# Altium PCB PCB1.PcbDoc
Units mm, origin at the board's own origin, x right, y up, seen from the top; angles counter-clockwise.
Board outline 152.4 x 101.6 mm, 2 copper layers (Top Layer, Bottom Layer); 20 components, 20 nets, 78 pads, 22 vias.
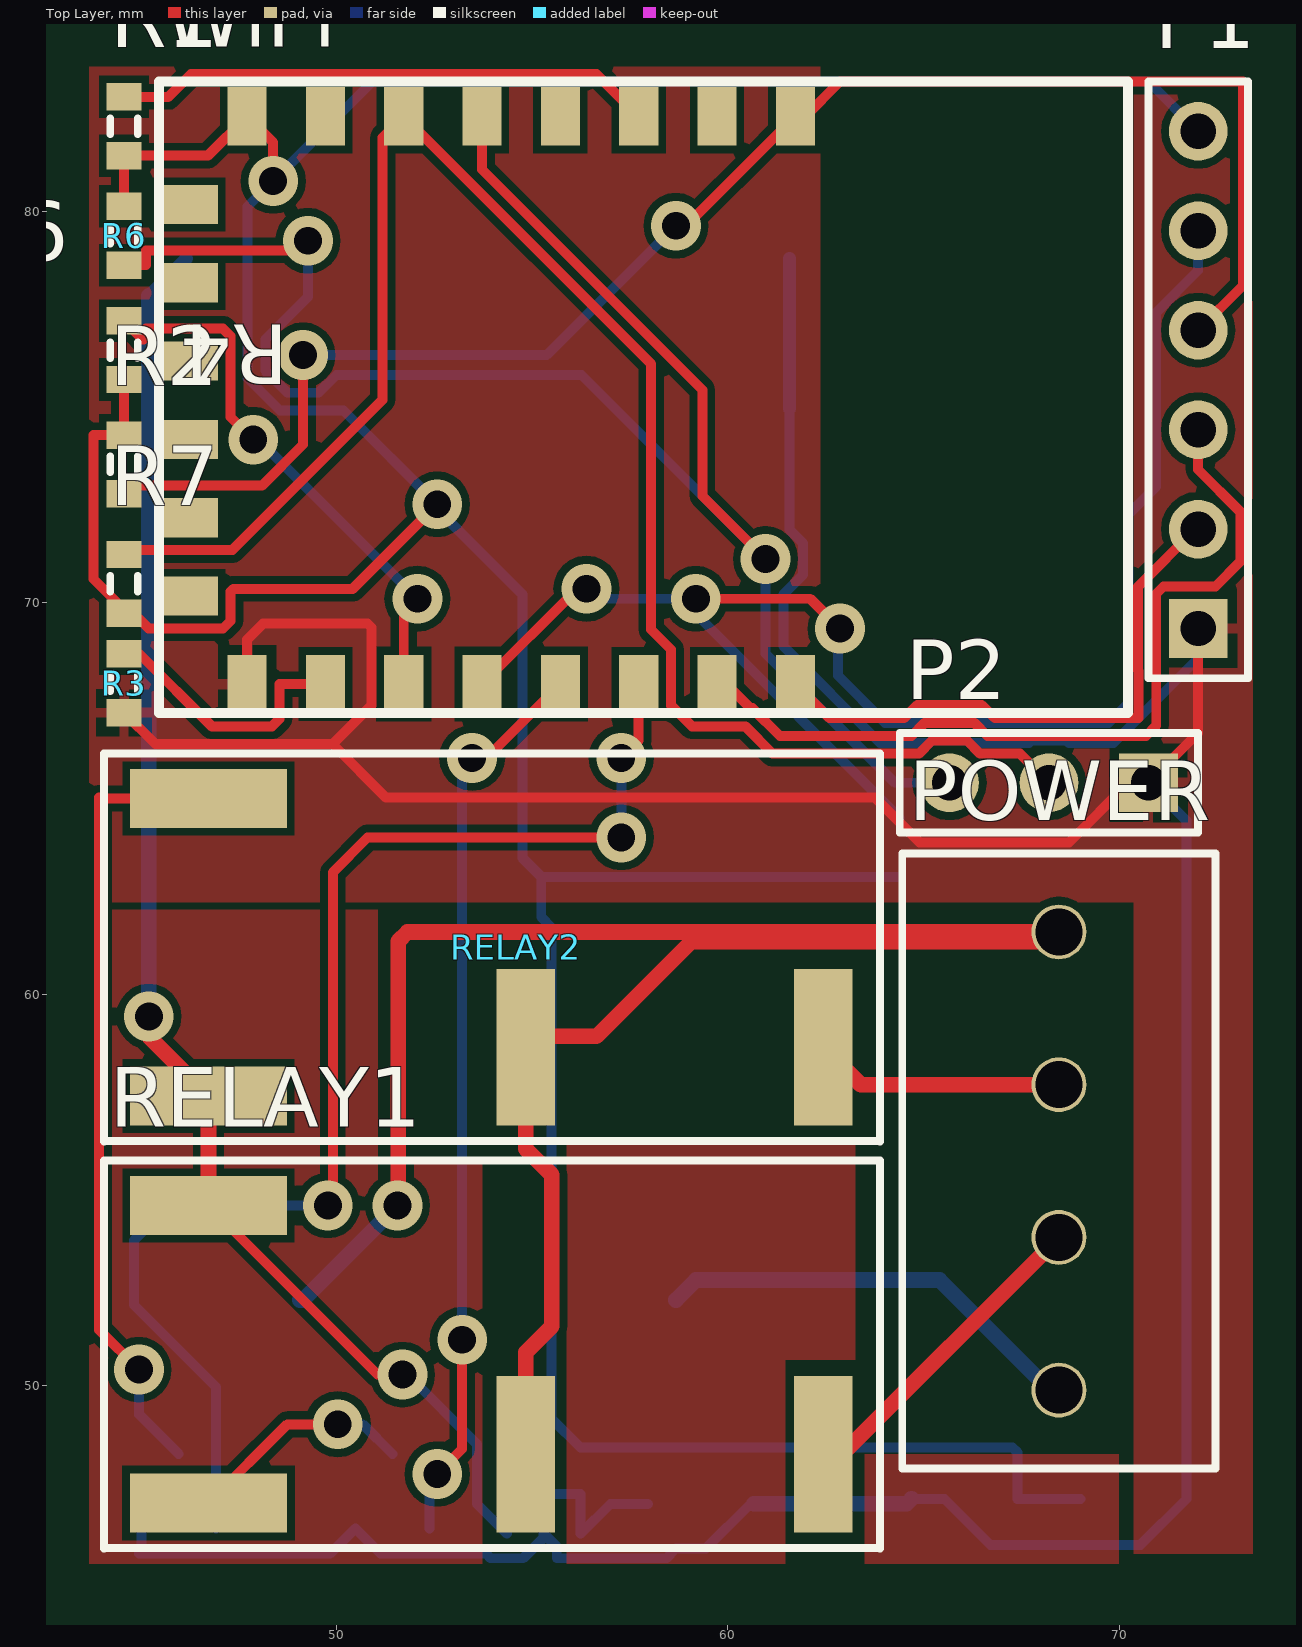
[diagram p0: Top Layer view]
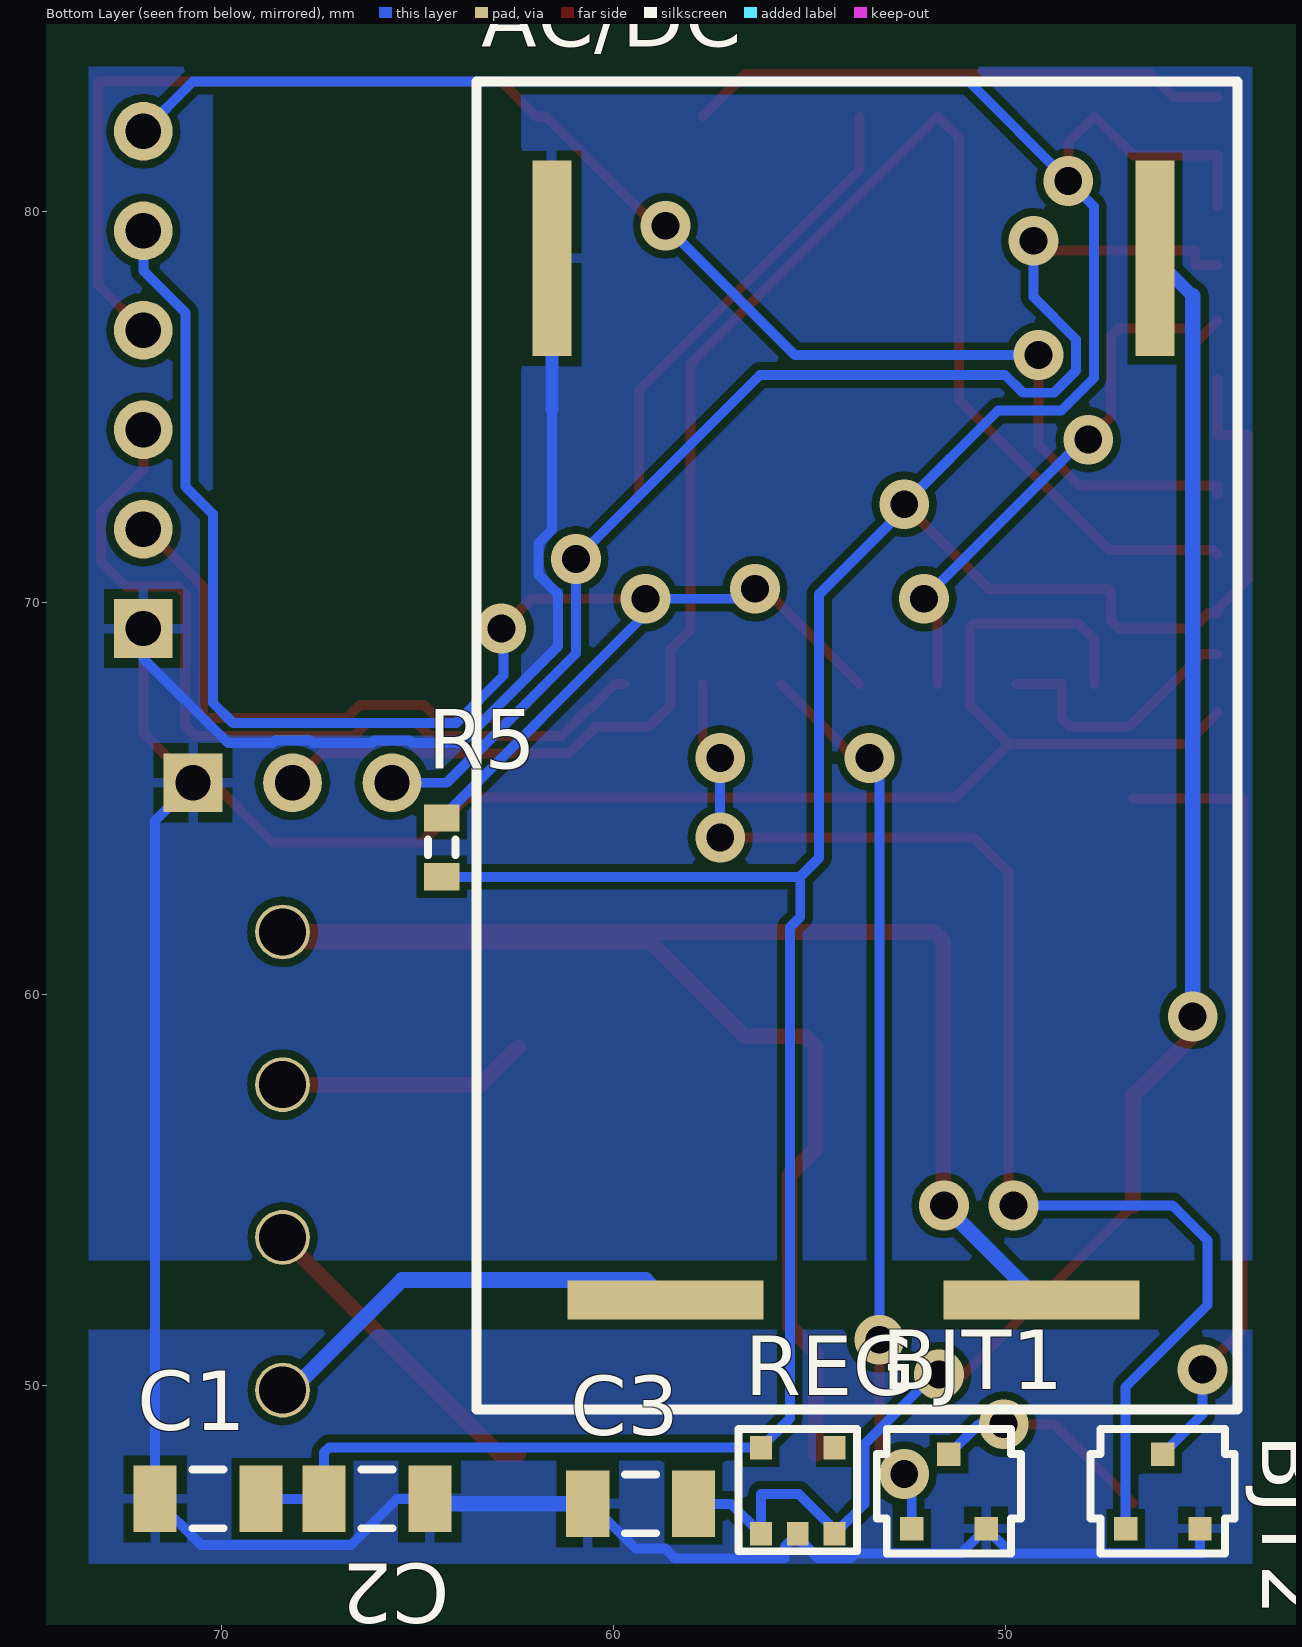
[diagram p1: Bottom Layer view, seen from below]

## Layer stack, top to bottom
Top Solder: solder mask 0.0102, Solder Resist, Dk 3.5
Top Layer: signal copper 0.0356
Dielectric 1: dielectric 0.32, FR-4, Dk 4.8
Bottom Layer: signal copper 0.0356
Bottom Solder: solder mask 0.0102, Solder Resist, Dk 3.5

## Board outline
25.4,25.4 177.8,25.4 177.8,127 25.4,127

## Design rules (kind name [scope] priority, off if disabled: settings)
Clearance [All] p1: gap=0.2 ignorepadtopadclearanceinfootprint=FALSE
PolygonConnect [All] p1: connectstyle=Relief reliefconductorwidth=0.254 reliefentries=4 polygonreliefangle="90 Angle" airgapwidth=0.254
RoutingVias [All] p1: holewidth=0.711 width=1.27 viastyle="Through Hole" minholewidth=0.711 minwidth=1.27 maxholewidth=0.711 maxwidth=1.27
SolderMaskExpansion [All] p1: expansion=0.102
Width [All] p1: maxlimit=0.4 minlimit=0.2 preferedwidth=0.254
30 further rules are at their usual default settings.

## Components (designator, comment, footprint, x,y, rotation, side; value= is the part's Value field where it differs from the comment)
AC/DC "HiLink" HiLink 58.674,52.197 r90 bottom
BJT1 "BJT_BC848B_SOT23" BJT_BC848B_SOT23 50.485,46.36 r0 bottom
BJT2 "BJT_BC848B_SOT23" BJT_BC848B_SOT23 45.024,46.36 r0 bottom
C1 "Cap Semi" C1206 70.358,47.117 r180 bottom value=10uF
C2 "Cap Semi" C1206 66.04,47.117 r0 bottom value=1uF
C3 "Cap Semi" C1206 59.309,46.99 r0 bottom value=22uF
P1 "Header 6" HDR1X6 72.009,69.342 r90 top
P2 "Header 3" HDR1X3 70.739,65.405 r180 top
POWER "Power_Connector" Power_Connector 68.453,49.895 r90 top
R1 "Res3" J1-0603 44.577,82.169 r90 top value=10K
R2 "Res3" J1-0603 44.577,73.533 r270 top value=10K
R3 "Res3" J1-0603 44.577,67.945 r90 top value=10K
R4 "Res3" J1-0603 44.577,76.454 r270 top value=10K
R5 "Res3" J1-0603 64.389,63.754 r270 bottom value=10K
R6 "Res3" J1-0603 44.577,79.375 r270 top value=10K
R7 "Res3" J1-0603 44.577,70.485 r90 top value=10K
REG "RT9013-33GB" RT9013-33GB 56.236,46.228 r180 bottom
RELAY1 "Relay" Relay 46.736,54.61 r180 top
RELAY2 "Relay" Relay 46.736,65.004 r180 top
WiFi "ESP-12F" ESP-12F 61.722,82.423 r270 top

## Footprints (in the part's own frame and the unit in brackets; to place one, negate y for a bottom-side part, rotate by r counter-clockwise, add the part's x,y. Pads: shape width x height; smd on the part's side, far side on the other; paste and mask are expansions set on the pad)
BJT_BC848B_SOT23 [mm]
  rect 0.6x0.6 smd: 1(1.9,0) 2(0,0) 3(0.95,-1.9)
  silkscreen extent -0.89,-2.54 2.79,0.64
C1206 [mm] "Chip Capacitor, Body 3.2x1.6mm, IPC High Density"
  rect 1.1x1.7 smd: 1(-1.35,0) 2(1.35,0)
  silkscreen extent -0.4,-0.75 0.4,0.75, body extent -1.7,-0.9 1.7,0.9, height 1.3
ESP-12F [mm]
  rect 1.5x1 smd: 1(0,0) 2(0,-2) 3(0,-4) 4(0,-6) 5(0,-8) 6(0,-10) 7(0,-12) 8(0,-14) 15(14.5,-14) 16(14.5,-12) 17(14.5,-10) 18(14.5,-8) 19(14.5,-6) 20(14.5,-4) 21(14.5,-2) 22(14.5,0)
  rect 1x1.5 smd: 9(2.25,-15.5) 10(4.25,-15.5) 11(6.25,-15.5) 12(8.25,-15.5) 13(10.25,-15.5) 14(12.25,-15.5)
  silkscreen extent -0.89,-16.26 15.24,8.5
HDR1X3 [mm] "Connector; Header; 3 Position"
  rect 1.5x1.5 hole 0.9: 1(0,0)
  round 1.5 hole 0.9: 2(2.54,0) 3(5.08,0)
  silkscreen extent -1.27,-1.27 6.35,1.27
HDR1X6 [mm] "Connector; Header; 6 Position"
  rect 1.5x1.5 hole 0.9: 1(0,0)
  round 1.5 hole 0.9: 2(2.54,0) 3(5.08,0) 4(7.62,0) 5(10.16,0) 6(12.7,0)
  silkscreen extent -1.27,-1.27 13.97,1.27
HiLink [mm]
  rect 1x5 smd: 1(0,0) 2(0,-9.6)
  rect 5x1 smd: 3(26.6,-12.5) 4(26.6,2.9)
  silkscreen extent -2.79,-14.61 31.11,4.83
J1-0603 [mm] "Chip Resistor, Body 1.6x0.8mm, IPC High Density"
  rect 0.7x0.9 smd: 1(-0.75,0) 2(0.75,0)
  silkscreen extent -0.2,-0.35 0.2,0.35, body extent -0.85,-0.48 0.85,0.48, height 0.9
Power_Connector [mm]
  round 1.4 hole 1.2: 1(0,0) 2(3.9,0) 3(7.8,0) 4(11.7,0)
  silkscreen extent -2,-4 13.7,4
Relay [mm]
  rect 4x1.5 smd: 1(0,0) 2(0,7.6)
  rect 1.5x4 smd: 3(-8.1,6.35) 4(-15.7,6.35)
  silkscreen extent -17.14,-1.15 2.67,8.76
RT9013-33GB [mm]
  rect 0.56x0.6 smd: 1(0,0) 2(0.94,0) 3(1.88,0) 4(1.88,2.2) 5(0,2.2)
  silkscreen extent -0.58,-0.45 2.45,2.67

## Part data
C1 C2 C3: "Capacitor (Semiconductor SIM Model)", LatestRevisionDate=29-May-2009, LatestRevisionNote="IPC-7351 Footprint Added.", PackageDescription="Chip Capacitor", PackageReference=C1206, Published=8-Jun-2000, Publisher="Altium Limited"
P1: "Header, 6-Pin", LatestRevisionDate=17-Jul-2002, LatestRevisionNote="Re-released for DXP Platform.", Publisher="Altium Limited"
P2: "Header, 3-Pin", LatestRevisionDate=17-Jul-2002, LatestRevisionNote="Re-released for DXP Platform.", Publisher="Altium Limited"
R1 R2 R3 R4 R5 R6 R7: "Resistor", LatestRevisionDate=29-May-2009, LatestRevisionNote="IPC-7351 Footprint Added.", PackageDescription="Chip Resistor", PackageReference=J1-0603, Published=8-Jun-2000, Publisher="Altium Limited"

## Via types
v1: diameter 1.27, hole 0.711, Top Layer to Bottom Layer, tented both sides, 18 vias
v2: diameter 1.27, hole 0.711, Top Layer to Bottom Layer, 3 vias
v3: diameter 1.27, hole 0.711, Top Layer to Bottom Layer, tented bottom, 1 vias

## Nets (pads, with @x,y where several pads share a name; then routed paths per layer and width w, separated by ;. In a path a pad name is that pad's centre, name@x,y a point inside that pad or via, vN(x,y) a via of type N, cw(c..) or ccw(c..) an arc to the next point about the centre after c; other vN are vias at no path point)
C1: BJT1.3 RELAY1.2 | length 5.8
  Top Layer w0.254: RELAY1.2 48.748,49.022 v2(50.038,49.022)
  Bottom Layer w0.254: v2(50.038,49.022) 50.673,49.022 BJT1.3
C2: BJT2.3 RELAY2.1 | length 20.4
  Top Layer w0.254: v1(44.958,50.419) 43.942,51.435 43.942,65.024 43.962,65.004 RELAY2.1
  Bottom Layer w0.254: v1(44.958,50.419) 44.958,49.276 BJT2.3
D0: P1.5 R5.1 WiFi.18 | length 40.5
  Top Layer w0.254: WiFi.18 56.157,70.358 v1(56.388,70.358) ; v1(59.182,70.104) 62.103,70.104 v1(62.865,69.342)
  Bottom Layer w0.254: v1(56.388,70.358) 56.642,70.104 v1(59.182,70.104) 59.182,69.711 R5.1 ; v1(62.865,69.342) 62.809,69.286 62.809,68.143 64.015,66.936 69.723,66.936 70.231,67.444 70.231,72.263 70.932,72.964 70.932,77.408 72.009,78.485 P1.5
D12: P2.2 R7.2 WiFi.6 | length 44.3
  Top Layer w0.254: R7.2 44.688,71.346 47.343,71.346 51.181,75.184 51.181,81.882 WiFi.6 58.039,76.106 58.039,69.318 58.549,68.808 58.549,67.384 59.087,66.846 60.444,66.846 61.142,66.148 64.879,66.148 65.213,66.482 66.105,66.482 66.439,66.148 67.456,66.148 P2.2
D14: P2.3 R6.2 WiFi.5 | length 46.9
  Top Layer w0.254: R6.2 45.145,78.625 45.145,79 49.028,79 v1(49.276,79.248) ; WiFi.5 53.722,81.065 59.349,75.438 59.349,72.731 v1(60.96,71.12)
  Bottom Layer w0.254: v1(49.276,79.248) 49.276,77.814 48.187,76.725 48.187,75.929 48.751,75.365 49.547,75.365 50.001,75.819 56.261,75.819 v1(60.96,71.12) 60.96,68.707 64.262,65.405 P2.3
EN: R1.2 WiFi.3 | length 13.8
  Top Layer w0.254: R1.2 45.708,82.919 46.289,83.5 56.645,83.5 WiFi.3
F1: BJT1.1 WiFi.19 | length 23.5
  Top Layer w0.254: v1(52.578,47.752) 53.213,48.387 v1(53.213,51.181) ; v1(53.467,66.04) 53.839,66.04 WiFi.19
  Bottom Layer w0.254: BJT1.1 52.385,47.559 v1(52.578,47.752) ; v1@53.202,66.281 53.213,66.294 v1(53.467,66.04) 53.213,65.786 v1(53.213,51.181)
F2: BJT2.1 WiFi.20 | length 33.9
  Top Layer w0.254: v2(49.784,54.61) 49.911,54.737 49.911,63.119 50.8,64.008 v1(57.277,64.008) ; v1(57.277,66.04) 57.722,66.485 WiFi.20
  Bottom Layer w0.254: BJT2.1 46.924,49.977 44.831,52.07 44.831,53.721 45.72,54.61 v2(49.784,54.61) ; v1(57.277,64.008) v1(57.277,66.04)
GND: AC/DC.4 BJT1.2 BJT2.2 C1.1 C2.1 C3.2 P1.1 P2.1 R3.1 REG.2 WiFi.15 | length 113.2
  Top Layer w0.254: R3.1 45.38,66.392 49.903,66.392 51.271,65.024 63.754,65.024 64.897,63.881 68.707,63.881 70.231,65.405 P2.1 72.009,66.675 P1.1 ; WiFi.15 47.722,69.058 48.133,69.469 50.8,69.469 50.895,69.374 50.895,67.384 49.932,66.421
  Bottom Layer w0.254: BJT2.2 45.024,45.786 44.958,45.72 49.845,45.72 BJT1.2 51.125,45.72 53.822,45.72 53.941,45.601 54.771,45.601 55.296,46.126 REG.2 55.629,45.895 55.629,45.601 58.432,45.601 58.678,45.847 59.436,45.847 60.579,46.99 C3.2 ; 61.574,74.951 61.574,71.866 61.922,71.518 61.922,70.722 61.414,70.214 61.414,68.895 63.888,66.421 65.152,66.421 65.213,66.482 66.105,66.482 66.166,66.421 67.692,66.421 67.753,66.482 68.645,66.482 68.706,66.421 69.85,66.421 72.009,68.58 P1.1 ; C2.1 65.528,47.117 66.705,45.94 70.531,45.94 C1.1 71.708,64.436 P2.1
  Bottom Layer w0.33: 61.574,74.951 AC/DC.4
  Bottom Layer w0.4: C3.2 64.563,46.99 C2.1
LAMP1: POWER.2 RELAY1.4 | length 8.3
  Top Layer w0.4: RELAY1.4 62.918,48.26 POWER.2
LAMP2: POWER.3 RELAY2.4 | length 6.4
  Top Layer w0.4: RELAY2.4 63.395,57.695 POWER.3
NetR3_2: R3.2 WiFi.16 | length 6.9
  Top Layer w0.254: R3.2 44.97,68.695 46.819,66.846 48.357,66.846 48.549,67.038 48.549,67.923 WiFi.16
NetR4_1: R4.1 WiFi.17 | length 14.3
  Top Layer w0.254: R4.1 45.054,76.727 45.08,76.727 45.145,76.792 45.145,77 47.107,77 47.299,76.808 47.299,74.748 v1(47.879,74.168) ; WiFi.17 51.722,69.756 v1(52.07,70.104)
  Bottom Layer w0.254: v1(47.879,74.168) 48.006,74.168 v1(52.07,70.104)
NULL: AC/DC.1 POWER.1 | length 11.2
  Bottom Layer w0.4: AC/DC.1 59.182,52.705 65.405,52.705 68.215,49.895 POWER.1
PHASE: AC/DC.2 POWER.4 RELAY1.3 RELAY2.3 | length 53
  Top Layer w0.4: v2(51.562,54.61) 51.581,54.629 51.581,61.36 51.816,61.595 POWER.4 68.199,61.341 59.055,61.341 56.642,58.928 55.11,58.928 RELAY2.3 54.836,56.055 55.499,55.393 55.499,51.521 54.836,50.859 RELAY1.3
  Bottom Layer w0.4: AC/DC.2 49.149,52.197 v2(51.562,54.61)
RST: P1.4 R2.2 WiFi.1 | length 41.2
  Top Layer w0.254: R2.2 44.577,73 48.108,73 49.149,74.041 v1(49.149,76.327) ; v1(58.674,79.629) 58.928,79.629 WiFi.1 61.976,82.423 62.865,83.312 73.152,83.312 73.152,78.105 P1.4
  Bottom Layer w0.254: v1(49.149,76.327) 55.372,76.327 v1(58.674,79.629)
RX: P1.3 WiFi.21 | length 21.8
  Top Layer w0.254: WiFi.21 59.966,67.923 60.579,67.31 60.623,67.31 61.331,66.602 64.691,66.602 65.025,66.936 66.293,66.936 66.627,66.602 70.673,66.602 70.939,66.868 70.939,68.45 70.932,68.457 70.932,70.227 71.124,70.419 72.451,70.419 73.086,71.054 73.086,72.328 72.009,73.405 P1.3
TX: P1.2 WiFi.22 | length 14.9
  Top Layer w0.254: WiFi.22 62.589,67.056 64.503,67.056 64.837,67.39 66.481,67.39 66.815,67.056 70.485,67.056 70.485,68.261 70.478,68.268 70.478,70.416 71.944,71.882 P1.2
VCC3.3: C1.2 C2.2 P1.6 R1.1 R2.1 R4.2 R5.2 R6.1 R7.1 REG.5 WiFi.8 | length 109.2
  Top Layer w0.254: R4.2 R2.1 43.8,74.283 43.8,70.608 44.577,69.831 R7.1 44.819,69.735 45.208,69.346 47.107,69.346 47.299,69.538 47.299,70.286 47.371,70.358 50.419,70.358 v1(52.578,72.517) ; R6.1 R1.1 46.718,81.419 WiFi.8 48.387,81.758 v1(48.387,80.772)
  Bottom Layer w0.25: C2.2 C1.2
  Bottom Layer w0.254: R5.2 55.233,63.004 ; C2.2 67.39,48.307 67.269,48.428 REG.5 55.499,49.165 55.499,61.71 55.233,61.976 55.233,63.004 ; P1.6 70.739,83.312 50.927,83.312 v1(48.387,80.772) 47.733,80.118 47.733,75.74 48.562,74.911 50.184,74.911 v1(52.578,72.517) 52.578,72.39 54.749,70.219 54.749,63.488 55.233,63.004
VCC5: AC/DC.3 C3.1 REG.1 REG.3 RELAY1.1 RELAY2.2 | length 42.6
  Top Layer w0.254: RELAY1.1 51.054,50.292 v1(51.689,50.292)
  Top Layer w0.33: v3@45.212,58.928 v3(45.212,59.436)
  Top Layer w0.4: v3@45.212,58.928 RELAY2.2 RELAY1.1
  Bottom Layer w0.254: v1(51.689,50.292) 51.816,50.292 53.594,48.514 53.594,46.99 REG.3 54.356,46.33 55.27,47.244 56.236,47.244 REG.1 56.998,46.99 C3.1
  Bottom Layer w0.33: 45.212,77.835 AC/DC.3
  Bottom Layer w0.4: v3(45.212,59.436) 45.212,77.835
pads on no net: REG.4 WiFi.2 WiFi.4 WiFi.7 WiFi.9 WiFi.10 WiFi.11 WiFi.12 WiFi.13 WiFi.14

## Polygon pours and split planes (outlines as drawn)
LAMP2 on Top Layer "LAMP2_L01_P028" (solid, pour order 28): 63.5,45.466 63.5,48.26 69.977,48.26 69.977,45.466
LAMP2 on Top Layer "LAMP2_L01_P026" (solid, pour order 26): 55.88,56.261 63.246,56.261 63.246,50.673 61.468,50.673 61.468,45.466 55.88,45.466
GND on Top Layer "GND_L01_P022" (solid, pour order 22): 43.688,55.753 53.721,55.753 53.721,45.466 43.688,45.466
GND on Top Layer "GND_L01_P014" (solid, pour order 14): 51.054,62.166 43.688,62.166 43.688,52.959 49.149,52.959 51.054,55.245
GND on Top Layer "GND_L01_P008" (solid, pour order 8): 62.353,66.865 70.358,66.865 70.358,62.357 62.353,62.357
GND on Top Layer "GND_L01_P006" (solid, pour order 6): 70.358,83.566 73.406,83.566 73.406,45.72 70.358,45.72
GND on Top Layer "GND_L01_P004" (solid, pour order 4): 43.688,83.694 54.991,83.694 62.353,83.694 62.353,62.353 43.688,62.353
GND on Bottom Layer "BOTTOM LayerQ1" (solid, pour order 30): 43.688,83.693 73.406,83.693 73.406,53.213 43.688,53.213
GND on Bottom Layer "BOTTOM LayerQQ" (solid, pour order 32): 43.688,51.435 43.688,45.466 73.406,45.466 73.406,51.435

## Other copper
Bottom Layer:
  pour cut-out: 62.357,83.693 70.231,83.693 70.231,67.056 62.357,67.056